# Altium PCB 飞控板.PcbDoc
Units mil, origin at the board's own origin, x right, y up, seen from the top; angles counter-clockwise.
Board outline 2575 x 2635 mil, 2 copper layers (Top Layer, Bottom Layer); 58 components, 95 nets, 351 pads, 114 vias.
Unrouted connection lines stored in the file: 8.
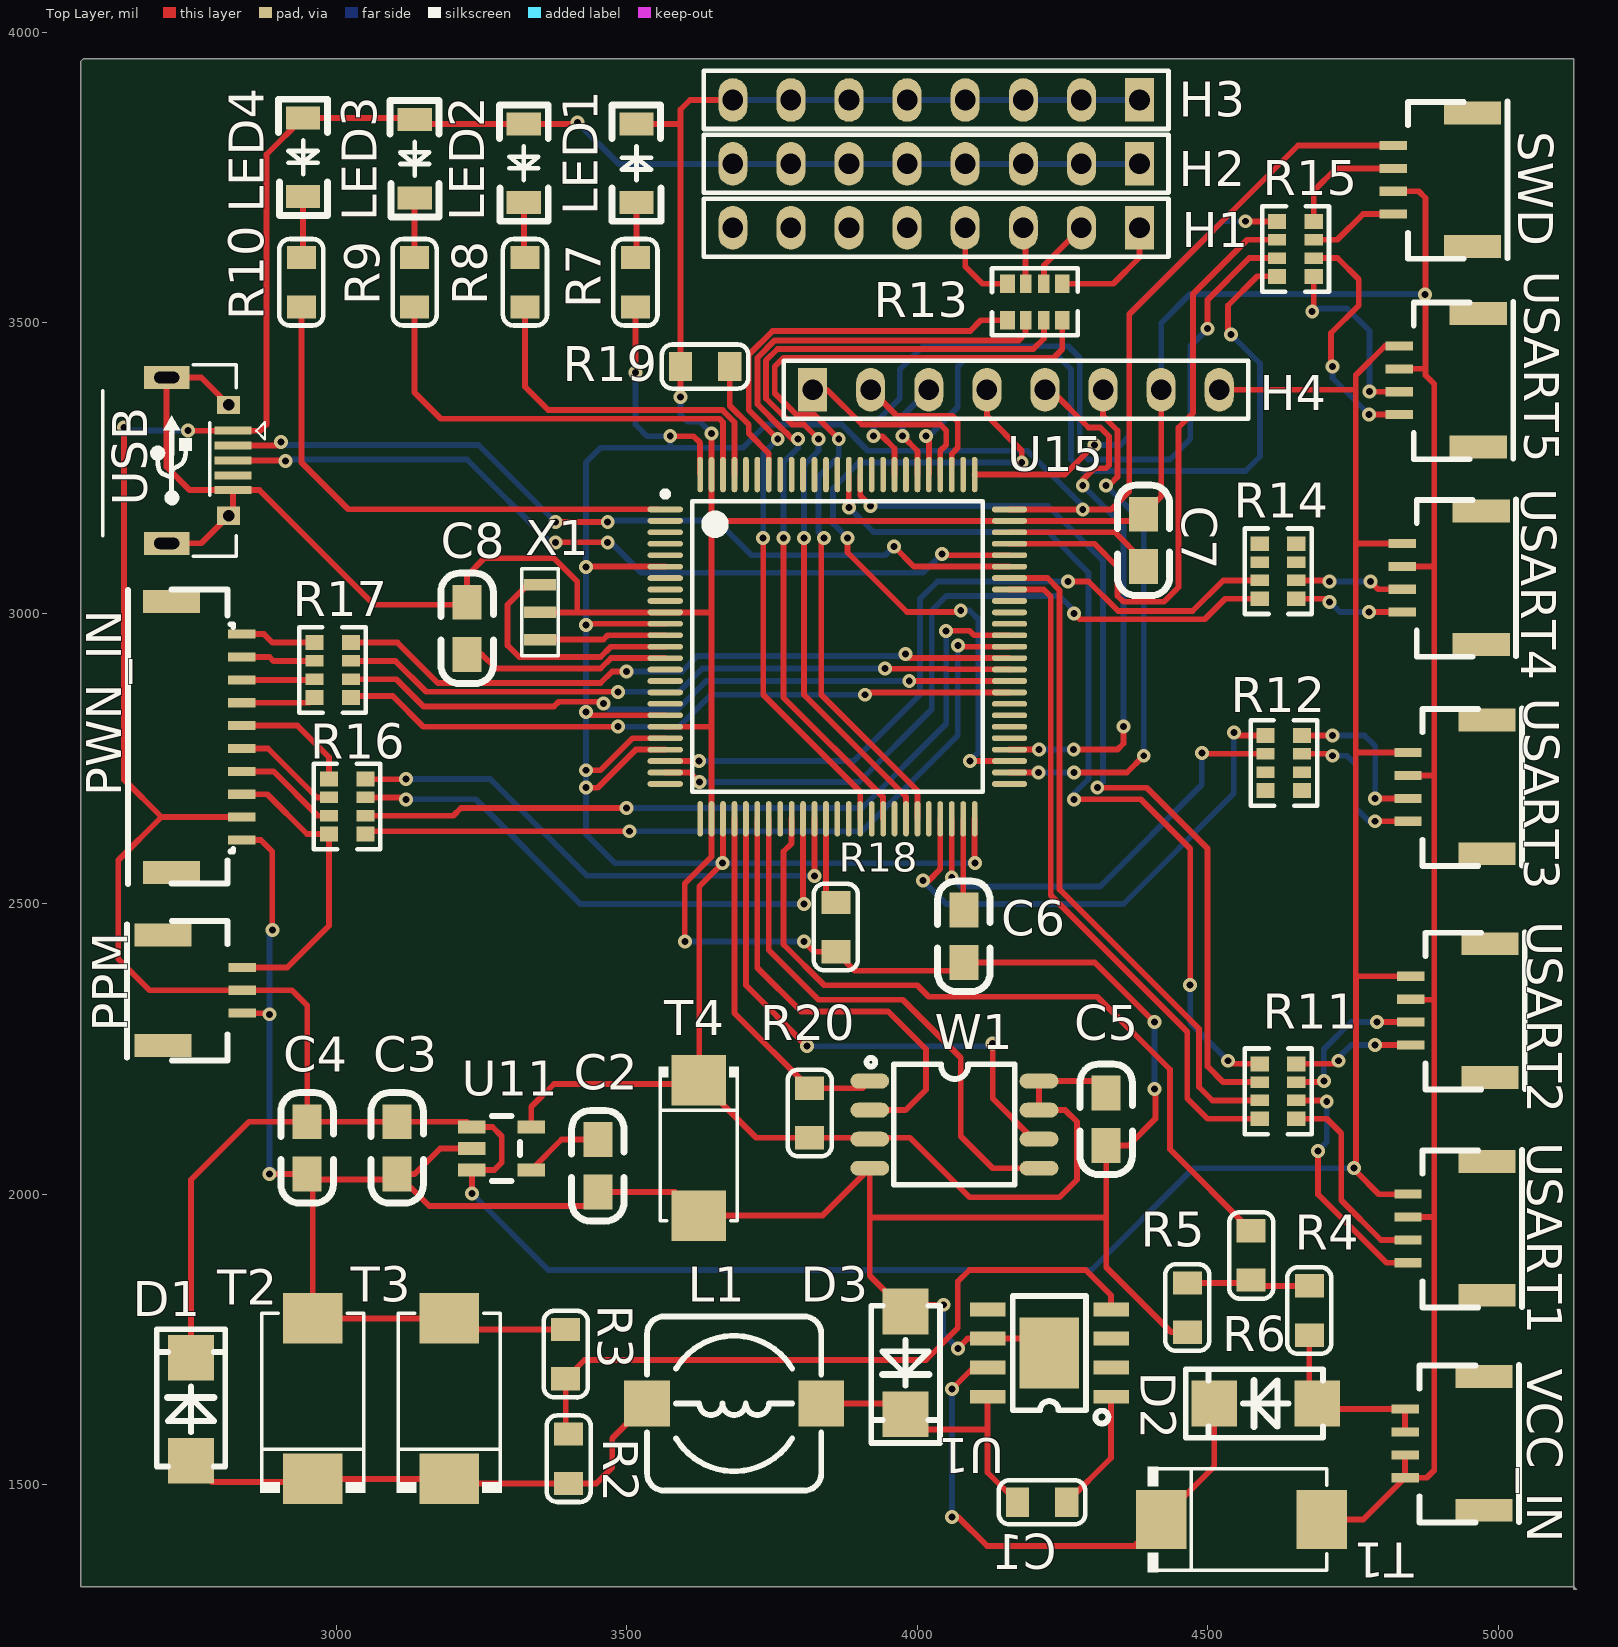
[diagram p0: Top Layer view]
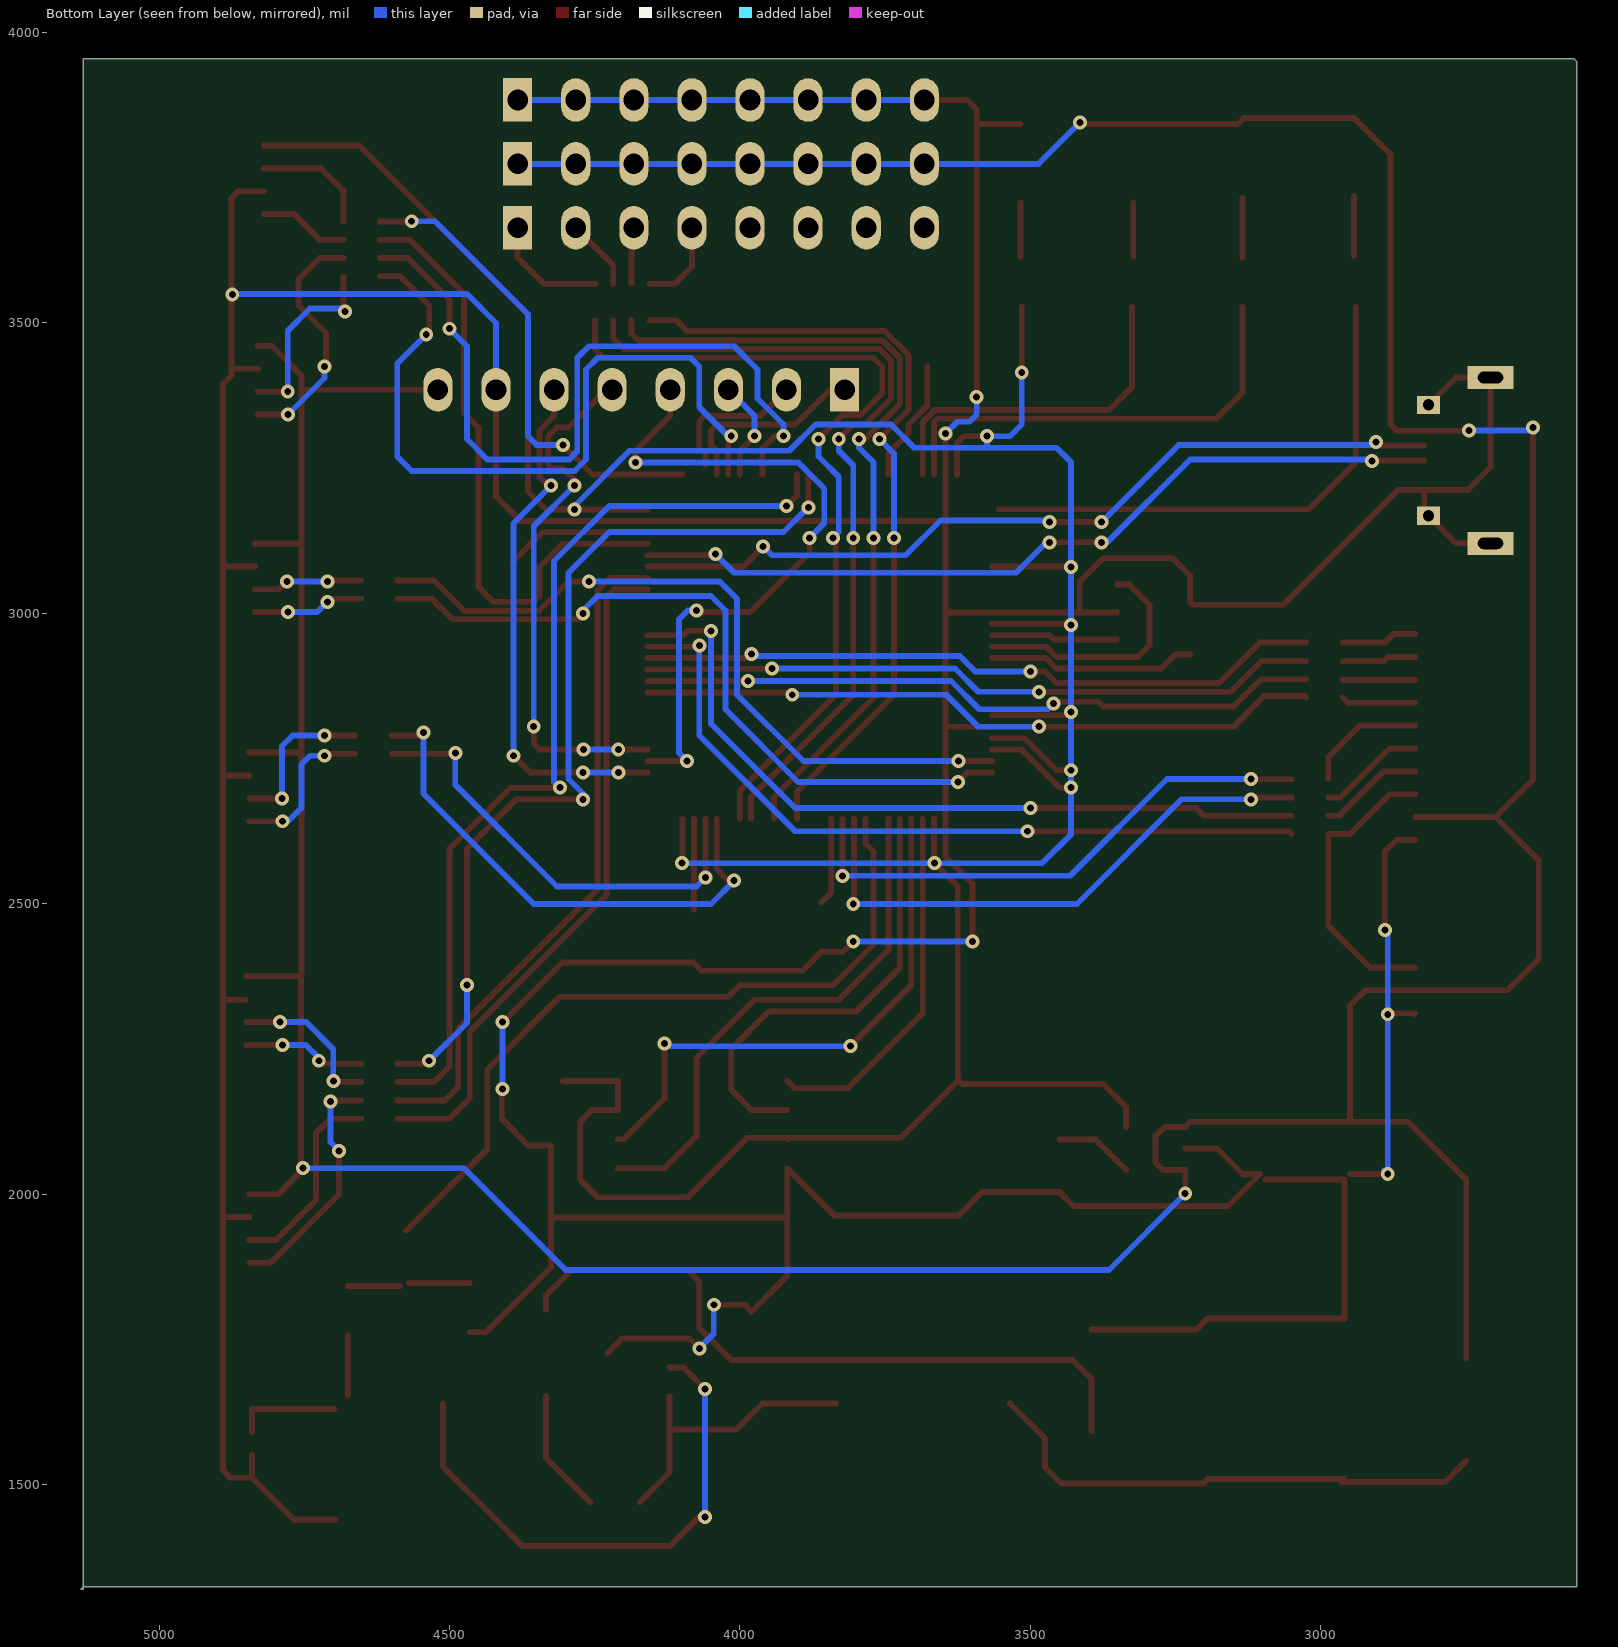
[diagram p1: Bottom Layer view, seen from below]
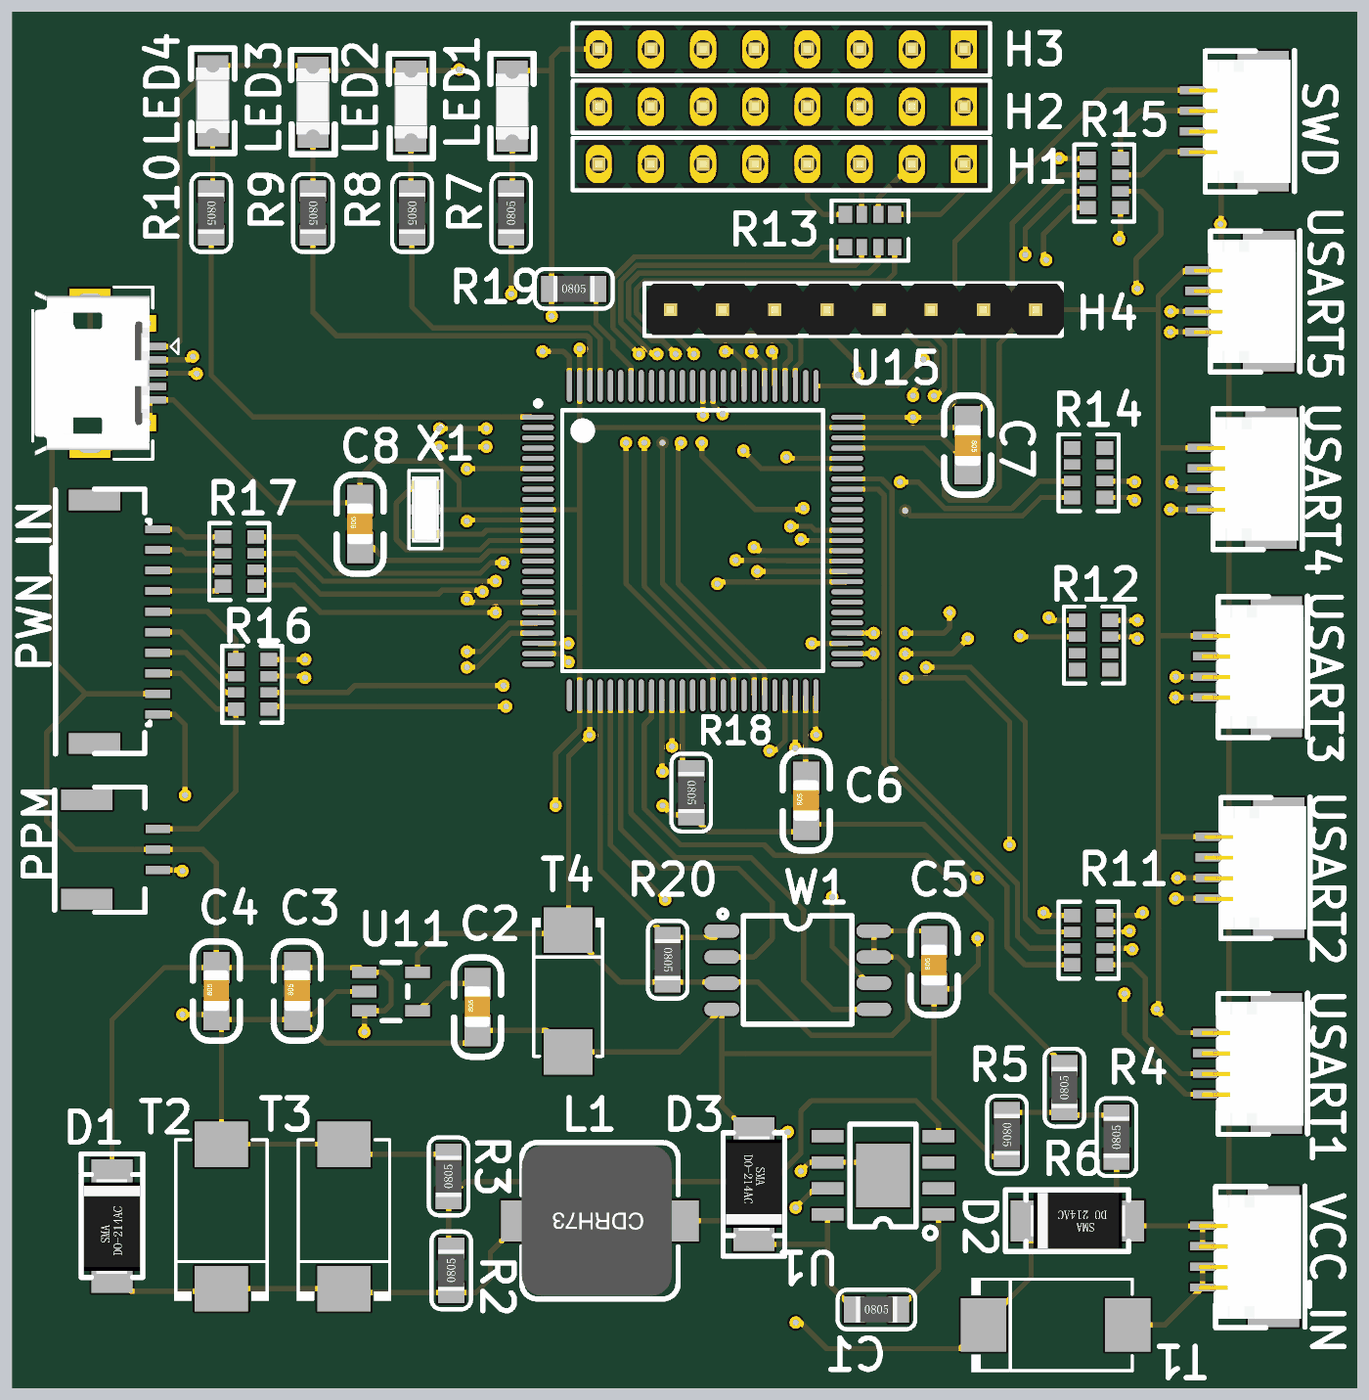
[diagram p2: 3D render of the assembled board from above, using the file's embedded part models]

## Layer stack, top to bottom
Top Layer: signal copper 1.4
Dielectric: dielectric 12.6, FR-4, Dk 4.8
Bottom Layer: signal copper 1.4

## Board outline
5135,1320 5130,1325 2560,1325 2560,3950 2565,3955 5130,3955 5130,1320

## Design rules (kind name [scope] priority, off if disabled: settings)
Clearance Clearance_3 [All] p1: gap=1
Clearance Clearance_2 [All] p2: gap=1
Clearance Clearance_1 [All] p3: gap=1
Clearance [All] p4: gap=1
PolygonConnect [All] p1: connectstyle=Relief reliefconductorwidth=10 reliefentries=4 polygonreliefangle="90 Angle"
RoutingVias [All] p1: holewidth=28 width=50 viastyle="Through Hole" minholewidth=28 minwidth=50 maxholewidth=28 maxwidth=50
SilkscreenOverComponentPads [All] p1: minsilkscreentomaskgap=10
SolderMaskExpansion [All] p1: expansion=4
Width [All] p1: maxlimit=10 minlimit=10 preferedwidth=10
27 further rules are at their usual default settings.

## Components (designator, comment, footprint, x,y, rotation, side; value= is the part's Value field where it differs from the comment)
C1 "10nF50V" 0805L 4215,1470 r0 top
C2 "0.1uf50v" 0805C 3450,2005 r90 top
C3 "0.1uf50v" 0805C 3104.6,2035.71 r90 top
C4 "4.7uf16v" 0805C 2949.6,2035.71 r90 top
C5 "1uf10v" 0805C 4325,2085 r90 top
C6 "0.1uf50v" 0805C 4080,2400 r90 top
C7 "0.1uf50v" 0805C 4390,3170 r270 top
C8 "0.1uf50v" 0805C 3225,2930 r90 top
D1 "1N5819" DO214AC_SMA 2750,1630 r90 top
D2 "1N5819" DO214AC_SMA 4600,1640 r180 top
D3 "1N5819" DO214AC_SMA 3980,1710 r270 top
H1 "Header 8" HDR1X8 4032.68,3663.78 r180 top
H2 "Header 8" HDR1X8 4032.68,3773.78 r180 top
H3 "Header 8" HDR1X8 4032.68,3883.78 r180 top
H4 "Header 8" HDR1X8 4170,3385 r0 top
L1 "CD54-22UH2A" CDRH73 3685,1640 r180 top
LED1 "" LED-1206 3515,3785 r180 top
LED2 "" LED-1206 3325,3765 r0 top
LED3 "" LED-1206 3137,3772.5 r0 top
LED4 "" LED-1206 2945,3775 r0 top
PPM "PPM" SH1.0-3P 2770,2370 r90 bottom (schematic designator U9)
PWN_IN "SH1.0-10P" SH1.0-10P 2755,2765 r90 top (schematic designator P1)
R2 "50K" 0805R 3400,1545 r90 top
R3 "15K" 0805R 3395,1725 r90 top
R4 "10K" 0805R 4675,1800 r90 top
R5 "1K" 0805R 4465,1805 r270 top
R6 "1K" 0805R 4575,1895 r90 top
R7 "1K" 0805R 3515,3570 r90 top
R8 "1K" 0805R 3325,3570 r270 top
R9 "1K" 0805R 3135,3570 r270 top
R10 "1K" 0805R 2940,3570 r270 top
R11 "1k0603" 1k0603#1 4620,2185 r270 top
R12 "1k0603" 1k0603#2 4630,2735 r90 top
R13 "1k0603" 1k0603#2 4210,3535 r180 top
R14 "1k0603" 1k0603#2 4620,3065 r90 top
R15 "1k0603" 1k0603#1 4650,3635 r270 top
R16 "1k0603" 1k0603#2 3020,2675 r270 top
R17 "1k0603" 1k0603#2 2995,2910 r270 top
R18 "10K" 0805R 3860,2460 r270 top
R19 "10K" 0805R 3635,3425 r0 top
R20 "4.3K" 0805R 3815,2140 r270 top
SWD "SWD" SH1.0-4P 4930,3750 r270 top (schematic designator U10)
T1 "TC100UF" TC100UF 4570,1435 r180 top
T2 "47UF16V" 47UF16V 2950,1655 r270 top
T3 "47UF16V" 47UF16V 3185,1655 r270 top
T4 "TC10UF" TC10UF 3630,2050 r270 top
U1 "TPS5430" TPS5430 4235,1760 r90 top
U11 "MIC5219" MIC5219 3280,2065 r270 top
U15 "STM32F407VGT6!" STM32F407VGT6! 3915,2975 r0 top
USART1 "USART1" SH1.0-4P 4955,1945 r270 top (schematic designator U3)
USART2 "USART2" SH1.0-4P 4960,2320 r270 top (schematic designator U4)
USART3 "USART3" SH1.0-4P 4955,2705 r270 top (schematic designator U5)
USART4 "USART4" SH1.0-4P 4945,3065 r270 top (schematic designator U6)
USART5 "USART5" SH1.0-4P 4940,3405 r270 top (schematic designator U7)
USB "ANO-USB" ANO-USB 2720,3260 r270 bottom (schematic designator U2)
VCC_IN "" SH1.0-4P 4950,1575 r270 top (schematic designator U8)
W1 "W25Q32" W25Q32 4075,2115 r270 top
X1 "陶瓷晶振" 陶瓷晶振 3360,2995 r270 top

## Footprints (in the part's own frame and the unit in brackets; to place one, negate y for a bottom-side part, rotate by r counter-clockwise, add the part's x,y. Pads: shape width x height; smd on the part's side, far side on the other; paste and mask are expansions set on the pad)
1k0603#1 [mm]
  rect 0.65x0.8 smd: 1(-1.008,-0.774) 4(1.392,-0.774) 5(1.392,0.826) 8(-1.008,0.826)
  rect 0.5x0.8 smd: 2(-0.208,-0.774) 3(0.592,-0.774) 6(0.592,0.826) 7(-0.208,0.826)
  silkscreen extent -1.68,-1.42 2.06,1.5
1k0603#2 [mm]
  rect 0.65x0.8 smd: 1(-1.008,0.774) 4(1.392,0.774) 5(1.392,-0.826) 8(-1.008,-0.826)
  rect 0.5x0.8 smd: 2(-0.208,0.774) 3(0.592,0.774) 6(0.592,-0.826) 7(-0.208,-0.826)
  silkscreen extent -1.68,-1.5 2.06,1.42
47UF16V [mm]
  rect 2.208x2.592 smd: 1(3.681,0.245) 2(-3.341,0.245)
  silkscreen extent -3.56,-2.06 4.28,2.55
0805C [mil]
  rect 60x50 smd: 1(-0.71,-0.4) 2(89.29,-0.4)
  silkscreen extent -51,-45 139,45, body extent 6,-25 84,25, height 31
0805L [mil]
  rect 40x50 smd: 1(-42.5,0) 2(42.5,0)
  silkscreen extent -75,-38 75,38, body extent -39,-25 39,25, height 22
0805R [mil]
  rect 40x50 smd: 1(-42.5,0) 2(42.5,0)
  silkscreen extent -75,-38 75,38, body extent -39,-25 39,25, height 22
ANO-USB [mm]
  rect 0.35x1.6 smd far side: 1(-1.385,-2.599) 2(-0.735,-2.599) 3(-0.085,-2.599) 4(0.565,-2.599) 5(1.215,-2.599)
  rect 1x2 hole 0.5 slot 1.1 at 90 deg: 5(-3.71,0.301) 5(3.54,0.301)
  rect 0.8x1 hole 0.5: 5(-2.51,-2.409) 5(2.34,-2.409)
  body extent -4.09,-2.59 3.92,3.01, height 2.8
CDRH73 [mm]
  rect 2x2 smd: 1(-3.81,0) 2(3.81,0)
  silkscreen extent -3.81,-3.81 3.81,3.81, body extent -3.49,-3.65 3.81,3.65, height 3.65
DO214AC_SMA [mm]
  rect 2x2 smd: 1(-2.25,0) 2(2.25,0)
  silkscreen extent -2.5,-1.5 3.5,1.5, body extent -2.33,-1.35 2.27,1.35, height 2.4
HDR1X8 [mm]
  rect 1.27x1.905 hole 0.9: 1(-8.89,0)
  oval 1.27x1.905 hole 0.9: 2(-6.35,0) 3(-3.81,0) 4(-1.27,0) 5(1.27,0) 6(3.81,0) 7(6.35,0) 8(8.89,0)
  silkscreen extent -10.16,-1.27 10.16,1.27, body extent -10.26,-1.25 10.06,1.25, height 3
LED-1206 [mil]
  rect 59.05x39.37 smd: 1(-2,77.5) 2(-2,-57.5)
  silkscreen extent -44,-90 40,110, body extent -33,-52 30,74, height 43
MIC5219 [mil]
  rect 21.7x47.2 smd: 1(-51,-46.4) 2(-14,-46.4) 3(23,-46.4) 4(23,55.6) 5(-51,55.6)
  silkscreen extent -70,-12 42,37
SH1.0-3P [mm]
  rect 1x2.5 smd far side: 0(-2.897,-1.728) 0(1.945,-1.728)
  rect 0.4x1.2 smd far side: 1(0.525,1.729) 2(-0.475,1.729) 3(-1.475,1.729)
SH1.0-4P [mm]
  rect 0.4x1.2 smd: 1(-1.406,-2.799) 2(-0.406,-2.799) 3(0.594,-2.799) 4(1.594,-2.799)
  rect 1x2.5 smd: 5(-2.827,0.658) 5(3.015,0.658)
  silkscreen extent -3.33,-2.16 3.55,2.18, body extent -2.89,-2.97 3.11,1.99, height 3.14
SH1.0-10P [mm]
  rect 1x2.5 smd: 0(-5.358,0.982) 0(6.484,0.982)
  rect 0.4x1.2 smd: 1(-3.937,-2.099) 2(-2.937,-2.099) 3(-1.937,-2.099) 4(-0.937,-2.099) 5(0.063,-2.099) 6(1.063,-2.099) 7(2.063,-2.099) 8(3.063,-2.099) 9(4.063,-2.099) 10(5.063,-2.099)
  silkscreen extent -5.87,-1.72 7.02,2.88
STM32F407VGT6! [mm]
  oval 1.55x0.25 smd: 1(-8.854,5.179) 2(-8.854,4.679) 3(-8.854,4.179) 4(-8.854,3.679) 5(-8.854,3.179) 6(-8.854,2.679) 7(-8.854,2.179) 8(-8.854,1.679) 9(-8.854,1.179) 10(-8.854,0.679) 11(-8.854,0.179) 12(-8.854,-0.321) 13(-8.854,-0.821) 14(-8.854,-1.321) 15(-8.854,-1.821) 16(-8.854,-2.321) 17(-8.854,-2.821) 18(-8.854,-3.321) 19(-8.854,-3.821) 20(-8.854,-4.321) 21(-8.854,-4.821) 22(-8.854,-5.321) 23(-8.854,-5.821) 24(-8.854,-6.321) 25(-8.854,-6.821) 51(6.196,-6.821) 52(6.196,-6.321) 53(6.196,-5.821) 54(6.196,-5.321) 55(6.196,-4.821) 56(6.196,-4.321) 57(6.196,-3.821) 58(6.196,-3.321) 59(6.196,-2.821) 60(6.196,-2.321) 61(6.196,-1.821) 62(6.196,-1.321) 63(6.196,-0.821) 64(6.196,-0.321) 65(6.196,0.179) 66(6.196,0.679) 67(6.196,1.179) 68(6.196,1.679) 69(6.196,2.179) 70(6.196,2.679) 71(6.196,3.179) 72(6.196,3.679) 73(6.196,4.179) 74(6.196,4.679) 75(6.196,5.179)
  oval 0.25x1.55 smd: 26(-7.329,-8.346) 27(-6.829,-8.346) 28(-6.329,-8.346) 29(-5.829,-8.346) 30(-5.329,-8.346) 31(-4.829,-8.346) 32(-4.329,-8.346) 33(-3.829,-8.346) 34(-3.329,-8.346) 35(-2.829,-8.346) 36(-2.329,-8.346) 37(-1.829,-8.346) 38(-1.329,-8.346) 39(-0.829,-8.346) 40(-0.329,-8.346) 41(0.171,-8.346) 42(0.671,-8.346) 43(1.171,-8.346) 44(1.671,-8.346) 45(2.171,-8.346) 46(2.671,-8.346) 47(3.171,-8.346) 48(3.671,-8.346) 49(4.171,-8.346) 50(4.671,-8.346) 76(4.671,6.704) 77(4.171,6.704) 78(3.671,6.704) 79(3.171,6.704) 80(2.671,6.704) 81(2.171,6.704) 82(1.671,6.704) 83(1.171,6.704) 84(0.671,6.704) 85(0.171,6.704) 86(-0.329,6.704) 87(-0.829,6.704) 88(-1.329,6.704) 89(-1.829,6.704) 90(-2.329,6.704) 91(-2.829,6.704) 92(-3.329,6.704) 93(-3.829,6.704) 94(-4.329,6.704) 95(-4.829,6.704) 96(-5.329,6.704) 97(-5.829,6.704) 98(-6.329,6.704) 99(-6.829,6.704) 100(-7.329,6.704)
  silkscreen extent -8.98,-7.17 5.02,5.98
TC10UF [mil]
  rect 86.91x93.54 smd: 1(-146.55,-6.01) 2(86.62,-6.01)
  silkscreen extent -170,-75 95,63
TC100UF [mil]
  rect 86.91x102.05 smd: 1(149.93,-5.35) 2(-126.55,-5.35)
  silkscreen extent -135,-96 173,85
TPS5430 [mm]
  rect 0.6x1.55 smd: 1(-2.747,-2.508) 2(-1.477,-2.508) 3(-0.207,-2.508) 4(1.063,-2.508) 5(1.063,2.892) 6(-0.207,2.892) 7(-1.477,2.892) 8(-2.747,2.892)
  rect 3.1x2.6 smd: 9(-0.842,0.192)
  silkscreen extent -3.93,-2.39 1.66,1.79
W25Q32 [mil]
  oval 25.59x66.86 smd: 1(-80,-156.54) 2(-30,-156.54) 3(20,-156.54) 4(70,-156.54) 5(70,134.81) 6(20,134.81) 7(-30,134.81) 8(-80,134.81)
  silkscreen extent -120,-162 99,93
陶瓷晶振 [mm]
  rect 0.5x1.4 smd: 1(-1.384,-0.24) 2(-0.184,-0.24) 3(1.016,-0.24)
  silkscreen extent -2.08,-1.04 1.72,0.56, body extent -1.78,-0.89 1.42,0.41, height 0.7

## Part data
C2 C3 C4 C5 C6 C7 C8: library part CAP
D1 D2 D3: library part 1N5817-5819SMD
L1: library part INDUCTOR
PPM SWD USART1 USART2 USART3 USART4 USART5 VCC_IN: library part SH1.
PWN_IN: library part SH1.0
R11 R12 R13 R14 R15 R16 R17: library part 1k
T1: library part TC1
T4: library part TC
U1: library part TPS
U11: library part MIC
U15: library part STM32F407V
USB: library part ANO
W1: library part W2

## Free pads (board coordinates)
  round 5 hole 5: 0(3485,2865) 0(3624.17,2745.83) 0(4260,3055) 0(4777.77,3002.23)
  round 13 hole 8: 0(4050,2970) 0(4070,2945)

## Via types
v1: diameter 24, hole 12, Top Layer to Bottom Layer, 112 vias
v2: diameter 24, hole 12, Top Layer to Bottom Layer, tented top, 2 vias

## Nets (pads, with @x,y where several pads share a name; then routed paths per layer and width w, separated by ;. In a path a pad name is that pad's centre, name@x,y a point inside that pad or via, vN(x,y) a via of type N, cw(c..) or ccw(c..) an arc to the next point about the centre after c; other vN are vias at no path point)
BOOT1: R18.1 U15.37 | length 151
  Top Layer w10: U15.37 3843,2519.5 R18.1
GND: C2.1 C3.1 C4.1 C5.1 C6.1 C7.1 C8.2 D3.1 H3.1 H3.2 H3.3 H3.4 H3.5 H3.6 H3.7 H3.8 H4.7 LED1.2 PPM.3 PWN_IN.1 R3.2 R5.2 R18.2 R19.1 SWD.3 T1.2 T2.2 T3.2 T4.2 U1.6 U1.9 U11.2 U15.10 U15.20 U15.27 U15.74 U15.99 USART1.2 USART2.2 USART3.2 USART4.2 USART5.2 USB.5 VCC_IN.3 VCC_IN.4 W1.4 X1.2 | length 13583
  Top Layer w10: USB.5@2708.15,3120.63 2767.6,3120.63 2814.84,3167.87 2822.32,3175.35 USB.5@2822.32,3212.17 ; USB.5@2814.84,3358.82 2767.6,3406.06 2708.15,3406.06 2708.15,3251.85 2747.83,3212.17 USB.5@2822.32,3212.17 ; PWN_IN.1 2870,2610 2890,2590 v1(2890,2455) ; PPM.3@2839.99,2310 PPM.3 2883.09,2311.91 v1(2885,2310) ; v1(2885,2035) C4.1 ; C3.1@3095.35,2025.35 2959.65,2025.35 T2.2 T3.2 3213.69,1767.5 R3.2 ; U11.2 3179,2079 3135,2035 C3.1 3160,1980 3426.11,1980 C2.1 3583.07,2004.29 T4.2 3836.84,1963.38 W1.4 3918.46,1960 ; X1.2 3351.06,3001.74 X1.2@3360.47,3001.74 ; X1.2@3359.45,3002.76 X1.2@3360.47,3001.74 ; LED1.2 3590,3842.5 ; U15.20 3646.01,2804.88 ; v1(3592.5,3372.5) R19.1 3592.5,3867.5 3608.78,3883.78 H3.8 ; v1(3600,2435) 3600,2535 3646.14,2581.14 U15.27 3646.14,3001.74 ; v1(3646.14,3310) U15.99 3646.14,3001.74 ; 3646.92,3159.22 U15.74 4378.11,3159.22 C7.1 4420,3201.11 H4.7 ; v1(3805,2435) 3822.5,2417.5 R18.2 3892.5,2385 4066.11,2385 C6.1 4305.71,2399.29 v1(4408.6,2296.4) ; v1(4045,1810) 3991.42,1810 D3.1 3918.46,1860.12 3918.46,1960 ; v1(4070,1735) 4086.85,1751.85 U1.6 4202.45,1751.85 U1.9 ; 4320.4,1960 3918.46,1960 ; v1@4410,2180 4410,2130 4364.29,2084.29 C5.1 4325.4,1874.6 4437.5,1762.5 R5.2 ; T1.2 4767.94,1440.35 VCC_IN.4 ; SWD.3 4863.4,3726.6 4875,3715 4875,3410 4890,3395 4890,2335 ; USART5.2 4874.03,3420.97 ; USART4.2 4885.97,3080.97 ; VCC_IN.3 VCC_IN.4 ; USART1.2 4889.03,1960.97 ; USART3.2 4889.03,2720.97 ; USART2.2@4850.79,2335 4890,2335 ; USB.5@2822.32,3212.17 2867.83,3212.17 3065,3015 3221.11,3015 C8.2 3225.4,3065.4 3255,3095 3375,3095 3415,3055 3415,3001.74 ; X1.2@3360.47,3001.74 3415,3001.74 ; 3415,3001.74 U15.10 3646.14,3001.74 ; VCC_IN.4 4877.23,1512.23 4890,1525 4890,2335
  Bottom Layer w10: v1(2890,2455) 2885,2450 v1(2885,2310) v1(2885,2035) v1@2891.28,2041.28 ; v1(3592.5,3372.5) 3592.5,3342.5 3605,3330 3626.14,3330 v1(3646.14,3310) ; v1(3600,2435) v1(3805,2435) ; H3.8 H3.7 H3.6 H3.5 H3.4 H3.3 H3.2 H3.1 ; v1(4045,1810) 4045,1760 v1(4070,1735) ; v1(4408.6,2181.4) v1(4408.6,2296.4) ; H4.7 4420,3500 4470,3550 4872.8,3550 v1(4873.9,3548.9)
LED_1: R8.2 U15.97 | length 613.6
  Top Layer w10: R8.2 3325,3390 3365,3350 3665,3350 3666.5,3348.5 3666.5,3347.94 3685.51,3328.94 U15.97
LED_2: R9.2 U15.98 | length 789.6
  Top Layer w10: R9.2 3135,3380 3180,3335 3660,3335 3665.83,3329.17 U15.98
LED_3: R10.2 U15.1 | length 915.1
  Top Layer w10: R10.2 2940,3260 3020.86,3179.14 U15.1@3554.14,3179.14
NetC1_1: C1.1 D3.2 L1.1 U1.8 | length 507.9
  Top Layer w10: L1.1 3961.42,1640 D3.2 4006.42,1595 4121.15,1595 ; U1.8 4121.15,1595 ; C1.1 4121.15,1521.35 4121.15,1595
NetC1_2: C1.2 U1.1 | length 213.4
  Top Layer w10: C1.2 4333.75,1546.25 U1.1
NetC2_2: C2.2 U11.4 | length 136.5
  Top Layer w10: U11.4 3387.89,2094.29 C2.2
NetC6_2: C6.2 U15.49 | length 155.9
  Top Layer w10: C6.2@4079.22,2490.48 U15.49
NetC7_2: C7.2 U15.73 | length 260.7
  Top Layer w10: U15.73 4340.47,3139.53 4389.6,3090.4 C7.2
NetC8_1: C8.1 U15.14 | length 358.5
  Top Layer w10: C8.1 3250.71,2929.29 3275,2905 3455,2905 3472.99,2922.99 U15.14
NetD1_1: D1.1 L1.2 R2.1 T2.1 T3.1 | length 901.7
  Top Layer w10: D1.1 2786.42,1505 2964.93,1505 2959.86,1510.07 T3.1 3202.21,1502.5 R2.1 3447.5,1502.5 3475,1530 3475,1580 L1.2
NetLED1_1: LED1.1 R7.2 | length 93
  Top Layer w10: R7.2@3517,3614.5 LED1.1
NetLED2_2: LED2.2 R8.1 | length 93
  Top Layer w10: R8.1@3323,3614.5 LED2.2
NetLED3_2: LED3.2 R9.1 | length 102.5
  Top Layer w10: R9.1 LED3.2
NetLED4_2: LED4.2 R10.1 | length 102
  Top Layer w10: R10.1@2943,3615.5 LED4.2
NetR2_2: R2.2 R3.1 U1.4 | length 1195.8
  Top Layer w10: R2.2@3395,1592.5 R3.1 3427.5,1715 4015,1715 4070,1770 4070,1850 4090,1870 4290,1870 4333.75,1826.25 U1.4
NetR4_2: R4.2 R5.1 R6.1 | length 195
  Top Layer w10: R5.1 R6.1@4570,1847.5 ; R6.1@4585,1842.5 R4.2
NetR19_2: R19.2 U15.94 | length 213.8
  Top Layer w10: R19.2 3677.5,3357.5 3710,3325 3710,3310 3744.57,3275.43 U15.94
NetU15_12: U15.12 X1.3 | length 218.9
  Top Layer w10: X1.3 3460,2955 3467.37,2962.37 U15.12
NetU15_13: U15.13 X1.1 | length 426.9
  Top Layer w10: X1.1 3329.49,3049.49 3295,3015 3295,2945 3315,2925 3455,2925 3472.68,2942.68 U15.13
OTG_FS_DM: U15.70 USB.2 | length 1431.8
  Top Layer w10: USB.2 2898.94,3288.94 v1(2905,3295) ; v1(3377.37,3157.37) v1(3467.37,3157.37) ; v1(3960,3115) 3994.52,3080.48 U15.70
  Bottom Layer w10: v1@2910,3290 3244.74,3290 v1(3377.37,3157.37) ; v1@3470,3160 3655,3160 3715,3100 3945,3100 v1(3960,3115)
OTG_FS_DP: U15.71 USB.3 | length 1424.2
  Top Layer w10: USB.3 2911.39,3263.35 v1(2912.37,3262.37) ; v1(3377.37,3122.37) v1(3467.37,3122.37) ; v1@4045.16,3100.16 U15.71
  Bottom Layer w10: v1@2915,3265 3225,3265 3367.63,3122.37 v1(3377.37,3122.37) ; v1@3470,3125 3525,3070 4010,3070 v1(4042.37,3102.37)
POWER_INPUT: R6.2 U15.34 | length 1311.7
  Top Layer w10: U15.34 3783.94,2603.94 3770,2590 3770,2430 3840,2360 4000,2360 4020,2340 4310,2340 4435,2215 4435,2077.5 R6.2
PPM_IN: PPM.1 PWN_IN.3 R16.5 | length 515.1
  Top Layer w10: PWN_IN.3 2881.26,2688.74 2949.81,2620.19 R16.5 2987.48,2462.48 2915.65,2390.65 PPM.1
PWMIN_2: PWN_IN.4 R16.6 | length 181.5
  Top Layer w10: PWN_IN.4 2891.89,2728.11 2968.32,2651.68 R16.6
PWMIN_3: PWN_IN.5 R16.7 | length 184.8
  Top Layer w10: PWN_IN.5 2882.52,2767.48 2966.82,2683.18 R16.7
PWMIN_4: PWN_IN.6 R16.8 | length 210.2
  Top Layer w10: PWN_IN.6 2933.15,2806.85 2987.48,2752.52 R16.8
PWMIN_5: PWN_IN.7 R17.5 | length 128.6
  Top Layer w10: PWN_IN.7 2953.52,2846.22 R17.5
PWMIN_6: PWN_IN.8 R17.6 | length 125.3
  Top Layer w10: PWN_IN.8 2961.39,2885.59 R17.6
PWMIN_7: PWN_IN.9 R17.7 | length 127.7
  Top Layer w10: PWN_IN.9 2837.68,2925 2885,2925 2891.82,2918.18 R17.7
PWMIN_8: PWN_IN.10 R17.8 | length 130.9
  Top Layer w10: PWN_IN.10 2875.67,2964.33 2890.33,2949.67 R17.8
PWMOUT_1: H1.1 R13.8 | length 202.8
  Top Layer w10: R13.8 4337.52,3567.52 4382.68,3612.68 H1.1
PWMOUT_2: H1.2 R13.7 | length 123
  Top Layer w10: R13.7 4218.18,3599.28 H1.2
PWMOUT_3: H1.3 R13.6 | length 97.9
  Top Layer w10: H1.3 4186.68,3659.78 R13.6
PWMOUT_4: H1.4 R13.5 | length 151.3
  Top Layer w10: H1.4 4082.68,3597.32 4112.48,3567.52 R13.5
PWMOUT_5: H1.5 R14.6
PWMOUT_6: H1.6 R14.5
PWMOUT_7: H1.7 R12.8
PWMOUT_8: H1.8 R12.7
SPI1_CLK: U15.30 W1.6 | length 953.7
  Top Layer w10: U15.30 3705.2,2359.8 v1(3810,2255) ; v1(4130,2260) 4130,2164.86 4199.86,2095 W1.6
  Bottom Layer w10: v1(3810,2255) v1@4125,2255
SPI1_MISO: U15.31 W1.2 | length 785.5
  Top Layer w10: U15.31 3724.88,2390.12 3800,2315 3950,2315 4015,2250 4015,2180 3980,2145 W1.2
SPI1_MOSI: U15.32 W1.5 | length 925.8
  Top Layer w10: U15.32 3744.57,2420.43 3830,2335 3975,2335 4075,2235 4075,2100 4130,2045 W1.5
SPI1_NSS: R20.1 U15.29 W1.1 | length 624.8
  Top Layer w10: 3685.51,2311.99 U15.29 ; 3686.5,2311 R20.1 3905.96,2182.5 W1.1
SPI2_CLK: H4.6 U15.52 | length 916.5
  Top Layer w10: U15.52 v1(4208.86,2726.14) ; v1(4270,2726.14) 4361.14,2726.14 v1(4390,2755) ; H4.6 4320,3340 4345,3315 4345,3235 v1@4330,3220
  Bottom Layer w10: v1(4208.86,2726.14) v1(4270,2726.14) ; v1(4325,3220) 4390,3155 v1(4390,2755)
SPI2_CS1: H4.3 U15.81 | length 195.3
  Top Layer w10: v1(3975,3305) 4000.48,3279.52 U15.81
  Bottom Layer w10: v1(3975,3305) 3975,3340 H4.3 H4.3@4020,3365
SPI2_CS2: H4.2 U15.78 | length 252
  Top Layer w10: H4.2 3965,3340 4060.53,3340 4070,3330.53 4070,3285 4059.53,3274.53 U15.78@4059.53,3255.47
SPI2_CS3: H4.1 U15.79 | length 359.3
  Top Layer w10: H4.1@3820,3365 H4.1 3845,3385 3905,3325 4040,3325 4050,3315 4050,3290 4039.85,3279.85 U15.79
SPI2_MISO: H4.4 U15.53 | length 1206.7
  Top Layer w10: v1(3880,3130) 3880,3105 3982.5,3002.5 4072.5,3002.5 v1(4075,3005) ; v1(4090.83,2745.83) U15.53 ; H4.4 4120,3340 4180,3280 v1(4180,3260)
  Bottom Layer w10: v1(3880,3130) 3855,3155 3855,3215 3900,3260 v1(4180,3260) ; v1(4075,3005) 4090,3005 4105,2990 4105,2760 v1(4090.83,2745.83)
SPI2_MOSI: H4.5 U15.54 | length 931.9
  Top Layer w10: U15.54 v1(4209.49,2765.51) ; H4.5 4230,3385 4295,3320 4315,3320 4330,3305 4330,3255 4325,3250 4305,3250 4285,3230 v1(4285,3220) ; v1(4269.49,2765.51) 4344.49,2765.51 4355,2776.01 v1(4355,2805)
  Bottom Layer w10: v1(4209.49,2765.51) v1(4269.49,2765.51) ; v1(4285,3220) 4355,3150 v1(4355,2805)
SPI2_NSS: U15.51
SWCLK: R15.1 U15.76 | length 824.4
  Top Layer w10: U15.76 4253.94,3238.94 v1(4305,3290) ; v1(4565,3675) 4565.33,3674.67 R15.1
  Bottom Layer w10: v1(4305,3290) 4350,3290 4365,3305 4365,3515 4525,3675 v1(4565,3675)
SWCLK_I: R15.8 SWD.2 | length 206.1
  Top Layer w10: R15.8 4682.52,3727.52 4720.97,3765.97 SWD.2
SWDIO: R15.2 U15.72 | length 1070.5
  Top Layer w10: U15.72 4305.15,3119.85 4345,3080 4345,3030 4355,3020 4425,3020 4450,3045 4450,3320 4475,3345 4475,3550 4568.18,3643.18 R15.2
SWDIO_I: R15.7 SWD.4 | length 155.5
  Top Layer w10: R15.7 4723.18,3643.18 4767.23,3687.23 SWD.4
TIM1_CH1: R13.4 U15.40 | length 1368.7
  Top Layer w10: v1(3735,3130) 3735,2860 3902.05,2692.95 U15.40 ; v1(3760,3300) 3710,3350 3710,3445 3751.22,3486.22 4091.22,3486.22 4109.53,3504.53 R13.4
  Bottom Layer w10: v1(3735,3130) 3735,3275 v1(3760,3300)
TIM1_CH2: R13.3 U15.42 | length 1411.9
  Top Layer w10: v1(3770,3130) 3770,2855 3941.42,2683.58 U15.42 ; v1(3795,3300) 3785,3300 3778,3307 3778,3307.46 3767.46,3318 3767,3318 3725,3360 3725,3440 3755,3470 4175,3470 4186.68,3481.68 R13.3
  Bottom Layer w10: v1(3770,3130) 3770,3260 3795,3285 v1(3795,3300)
TIM1_CH3: R13.2 U15.44 | length 1446.4
  Top Layer w10: v2(3805,3130) 3805,2860 3980.79,2684.21 U15.44 ; v1(3830,3300) 3805,3325 3785,3325 3740,3370 3740,3435.56 3759.44,3455 4200,3455 4218.18,3473.18 R13.2
  Bottom Layer w10: v2(3805,3130) 3805,3255 3830,3280 v1(3830,3300)
TIM1_CH4: R13.1 U15.45 | length 1488.4
  Top Layer w10: v1(3840,3130) 3835,3125 3835,2860 4000.48,2694.52 U15.45 ; v1(3865,3300) 3823.5,3341.5 3792.51,3341.5 3755,3379.01 3755,3425 3770,3440 4235,3440 4249.67,3454.67 R13.1
  Bottom Layer w10: v1(3840,3130) 3830,3140 3830,3235 3865,3270 v1(3865,3300)
TIM3_CH1: pad.0@4070,2945 R16.4 U15.63 | length 1334.8
  Top Layer w10: R16.4 3055.28,2625 v1(3505,2625) ; v1(4070,2945) 4072.32,2942.68 U15.63
  Bottom Layer w10: v1(3505,2625) 3905,2625 4070,2790 v1(4070,2945)
TIM3_CH2: pad.0@4050,2970 R16.3 U15.64 | length 1337.2
  Top Layer w10: R16.3 3201.68,2651.68 3215,2665 v1(3500,2665) ; v1(4050,2970) 4090,2970 4097.63,2962.37 U15.64
  Bottom Layer w10: v1(3500,2665) 3905,2665 4050,2810 v1(4050,2970)
TIM3_CH3: R16.2 U15.35 | length 977.4
  Top Layer w10: R16.2 3116.82,2683.18 v1(3120,2680) ; U15.35 3803.62,2501.38 v1(3805,2500)
  Bottom Layer w10: v1(3120,2680) 3240,2680 3420,2500 v1(3805,2500)
TIM3_CH4: R16.1 U15.36 | length 939.7
  Top Layer w10: R16.1 v1@3119.67,2714.67 ; v1(3823.31,2548.31) U15.36
  Bottom Layer w10: v1(3120,2715) 3265,2715 3431.69,2548.31 v1(3823.31,2548.31)
TIM4_CH1: R17.4 U15.59 | length 1180.7
  Top Layer w10: R17.4 3027.92,2857.64 3097.36,2857.64 3150,2805 v1(3485,2805) ; v1(3910,2860) 3913.94,2863.94 U15.59
  Bottom Layer w10: v1(3485,2805) 3590,2805 3645,2860 v1(3910,2860)
TIM4_CH2: R17.3 U15.60 | length 1181.6
  Top Layer w10: R17.3 3103.32,2886.68 3150,2840 3375,2840 3383,2848 3457,2848 v1(3460,2845) ; v1(3986.38,2883.62) U15.60
  Bottom Layer w10: v1(3460,2845) 3470,2835 3588.28,2835 3636.78,2883.5 3986.26,2883.5 v1(3986.38,2883.62)
TIM4_CH3: pad.0@3485,2865 R17.2 U15.61 | length 1172.1
  Top Layer w10: R17.2 3101.82,2918.18 3155,2865 v1(3485,2865) ; v1(3945,2905) U15.61
  Bottom Layer w10: v1(3485,2865) 3590,2865 3630,2905 v1(3945,2905)
TIM4_CH4: R17.1 U15.62 | length 1194.9
  Top Layer w10: R17.1 3105.33,2949.67 3175,2880 3455,2880 3475,2900 v1(3500,2900) ; v1(3980,2930) 3987.01,2922.99 U15.62
  Bottom Layer w10: v1(3500,2900) 3595,2900 3621.5,2926.5 3984.47,2926.5 3980.97,2930 v1(3980,2930)
TIM5_CH3: R14.4 U15.25
TIM5_CH4: R14.3 U15.26
TIM8_CH3: R12.2 U15.65
TIM8_CH4: R12.1 U15.66
USART1_RX: R11.3 U15.69 | length 1163.3
  Top Layer w10: U15.69 4224.21,3060.79 4245,3040 4245,2525 4485,2285 4485,2185 4508.32,2161.68 R11.3
USART1_RX_I: R11.6 USART1.4 | length 420.6
  Top Layer w10: R11.6 v1@4703.32,2161.68 ; v1(4690,2075) 4690,2000 4807.77,1882.23 USART1.4
  Bottom Layer w10: v1(4690,2075) 4705,2090 v1(4705,2160)
USART1_TX: R11.4 U15.68 | length 1176.4
  Top Layer w10: U15.68 4217.89,3041.11 4230,3029 4230,2515 4465,2280 4465,2165 4499.81,2130.19 R11.4
USART1_TX_I: R11.5 USART1.3 | length 346.1
  Top Layer w10: R11.5 4704.81,2130.19 4730,2105 4730,1990 4798.4,1921.6 USART1.3
USART2_RX: R11.1 U15.87 | length 1600.6
  Top Layer w10: v1(3882.37,3182.63) U15.87 ; v1(4270,2680) 4385,2680 4470,2595 v1(4470,2360) ; v1(4535,2230) 4540.33,2224.67 R11.1 R11.1@4589.53,2225.47
  Bottom Layer w10: v1(3882.37,3182.63) 3925,3140 4225,3140 4295,3070 4295,2715 4270,2690 v1(4270,2680) ; v1(4470,2360) 4470,2295 v1(4535,2230)
USART2_RX_I: R11.8 USART2.4 | length 213.7
  Top Layer w10: R11.8 4719.67,2224.67 v1(4725,2230) ; v1(4787.77,2257.23) USART2.4
  Bottom Layer w10: v1(4725,2230) 4725,2235 4747.23,2257.23 v1(4787.77,2257.23)
USART2_TX: R11.2 U15.86 | length 1604
  Top Layer w10: U15.86 3902.05,3202.95 v1(3920,3185) ; v1(4310,2700) 4395,2700 4500,2595 4500,2220 4526.82,2193.18 R11.2
  Bottom Layer w10: v1(3920,3185) 4225,3185 4320,3090 4320,2710 v1(4310,2700)
USART2_TX_I: R11.7 USART2.3 | length 272.4
  Top Layer w10: R11.7 4698.18,2193.18 v1(4700,2195) ; v1(4791.6,2296.6) USART2.3
  Bottom Layer w10: v1(4700,2195) 4700,2250 4746.6,2296.6 v1(4791.6,2296.6)
USART3_RX: R12.3 U15.48 | length 773.2
  Top Layer w10: v1(4059.53,2545.47) U15.48 ; v1@4491.68,2758.32 R12.3
  Bottom Layer w10: v1(4059.53,2545.47) 4075,2530 4315,2530 4490,2705 v1(4490,2760)
USART3_RX_I: R12.6 USART3.4 | length 269.6
  Top Layer w10: R12.6 v1@4711.68,2758.32 ; v1(4787.77,2642.23) USART3.4
  Bottom Layer w10: v1(4715,2755) 4740,2755 4755,2740 4755,2665 4777.77,2642.23 v1(4787.77,2642.23)
USART3_TX: R12.4 U15.47 | length 916.6
  Top Layer w10: v1(4010,2540) 4020,2540 4039.85,2559.85 U15.47 ; v1(4545,2795) 4550.19,2789.81 R12.4
  Bottom Layer w10: v1(4010,2540) 4050,2500 4355,2500 4545,2690 v1(4545,2795)
USART3_TX_I: R12.5 USART3.3 | length 279.7
  Top Layer w10: R12.5 v1@4714.81,2789.81 ; v1(4788.4,2681.6) USART3.3
  Bottom Layer w10: v1(4715,2790) 4770,2790 4788.4,2771.6 v1(4788.4,2681.6)
USART4_RX: R14.1 U15.24 | length 1296.1
  Top Layer w10: U15.24 3608.86,2726.14 v1(3625,2710) ; v2(4270,3000) 4280,2990 4495,2990 4530.33,3025.33 R14.1
  Bottom Layer w10: v1(3625,2710) 3900,2710 4025,2835 4025,3005 4050,3030 4245,3030 4270,3005 v2(4270,3000)
USART4_RX_I: pad.0@4777.77,3002.23 R14.8 USART4.4 | length 184.3
  Top Layer w10: R14.8 v1@4704.67,3025.33 ; v1(4777.77,3002.23) USART4.4
  Bottom Layer w10: v1(4710,3020) 4727.77,3002.23 v1(4777.77,3002.23)
USART4_TX: pad.0@3624.17,2745.83 pad.0@4260,3055 R14.2 U15.23 | length 1290.8
  Top Layer w10: U15.23 v1(3624.17,2745.83) ; v1(4260,3055) 4295,3055 4346,3004 4474,3004 4526.82,3056.82 R14.2
  Bottom Layer w10: v1(3624.17,2745.83) 3890.83,2745.83 4005,2860 4005,3025 4035,3055 v1(4260,3055)
USART4_TX_I: R14.7 USART4.3 | length 186
  Top Layer w10: R14.7 v1@4708.18,3056.82 ; v1(4780,3055) 4793.4,3041.6 USART4.3
  Bottom Layer w10: v1(4710,3055) v1(4780,3055)
USART5_RX: R15.3 U15.83 | length 1331.3
  Top Layer w10: v1(3925,3305) 3940,3305 3961.11,3283.89 U15.83 ; v1(4500,3490) 4500,3540 4571.68,3611.68 R15.3
  Bottom Layer w10: v1(3925,3305) 3925,3325 3970,3370 3970,3420 4010,3460 4260,3460 4280,3440 4280,3278.92 4293.92,3265 4435,3265 4470,3300 4470,3460 v1(4500,3490)
USART5_RX_I: R15.6 USART5.4 | length 424.2
  Top Layer w10: R15.6 4723.32,3611.68 4760,3575 4760,3530 4712.5,3482.5 4712.5,3427.5 v1(4715,3425) ; v1(4777.77,3342.23) USART5.4
  Bottom Layer w10: v1(4715,3425) 4715,3405 v1(4777.77,3342.23)
USART5_TX: R15.4 U15.80 | length 1310.1
  Top Layer w10: v1(4015,3305) 4020.16,3299.84 U15.80 ; v1(4540,3480) 4535,3485 4535,3530 4585.19,3580.19 R15.4
  Bottom Layer w10: v1(4015,3305) 4020,3305 4070,3355 4070,3425 4085,3440 4245,3440 4265,3420 4265,3265 4285,3245 4565,3245 4590,3270 4590,3430 v1(4540,3480)
USART5_TX_I: R15.5 USART5.3 | length 334
  Top Layer w10: v1(4680,3520) 4682.52,3522.52 R15.5 ; v1(4778.4,3381.6) USART5.3
  Bottom Layer w10: v1(4680,3520) 4685,3525 4740,3525 4778.4,3486.6 v1(4778.4,3381.6)
VCC_2S~6S: D2.1 R4.1 VCC_IN.1 VCC_IN.2 | length 284.9
  Top Layer w10: D2.1@4675,1653.58 R4.1 ; D2.1@4698.24,1630.34 VCC_IN.1 VCC_IN.2
VCC_3.3V: C5.2 R7.1 R20.2 SWD.1 T4.1 U11.5 U15.6 U15.11 U15.19 U15.21 U15.22 U15.28 U15.50 U15.75 U15.100 W1.3 W1.7 W1.8 | length 6455.2
  Top Layer w10: U11.5 3335.6,2150.6 3375,2190 3617.45,2190 T4.1 ; v1(3430,2700) 3450,2700 3515.51,2765.51 U15.22 ; v1(3430,2730) 3455,2730 3510.2,2785.2 U15.21 ; v1@3430.43,2824.57 U15.19 ; v1@3430.48,3080.48 U15.6 ; v1@3432.05,2982.05 U15.11 ; v1(3515,3415) R7.1 ; v1(3575,3305) 3615,3305 3626.46,3293.54 U15.100 ; v1(3665,2570) 3625,2530 3625,2197.55 T4.1 ; v1@3665.83,2570.83 U15.28 ; W1.3 W1.3@3915.96,2097.5 ; v1@4098.9,2571.1 U15.50 ; U15.75 v1(4285,3178.9) 4333.9,3178.9 4365,3210 4365,3515 4655.34,3805.34 SWD.1 ; C5.2@4304.7,2195 W1.8 W1.7 4255,2145 4275,2125 4275,2025 4245,1995 4090,1995 3987.5,2097.5 W1.3@3915.96,2097.5 ; T4.1 3723.04,2097.5 R20.2 W1.3@3915.96,2097.5
  Bottom Layer w10: v1(3515,3415) 3515,3325 3535,3305 v1(3575,3305) 3575,3287.5 ; v1@4099.06,2570 v1(3665,2570) 3480,2570 3430,2620 v1(3430,2700) v1(3430,2730) v1(3430,2830) v1(3430,2980) v1(3430,3080) 3430,3260 3455,3285 3700,3285 3740,3325 3870,3325 3915,3280 4190,3280 4285,3185 v1(4285,3178.9)
  other v1: 4099.53,2570.47
VCC_5.0V: C3.2 C4.2 D1.2 H2.1 H2.2 H2.3 H2.4 H2.5 H2.6 H2.7 H2.8 H4.8 LED2.1 LED3.1 LED4.1 PPM.2 PWN_IN.2 U11.1 U11.3 USART1.1 USART2.1 USART3.1 USART4.1 USART5.1 USB.1 | length 8698.8
  Top Layer w10: v1(2635,3320) 2635,2713.74 2699.37,2649.37 ; v1(2745,3315) 2745.47,3314.53 USB.1 2869.53,3314.53 2880,3325 2880,3790 2942.5,3852.5 LED4.1 3132.5,3852.5 LED3.1 3142.5,3842.5 LED2.1 v1@3412.5,3842.5 ; D1.2 2750,2025 2850,2125 C4.2 ; PWN_IN.2 2699.37,2649.37 ; v1(3233.6,2001.4) U11.3 3272,2042 3285,2055 3285,2100 3269,2116 U11.1 3224.6,2125 C3.2 C4.2 ; H4.8 4755,3385 ; 4755,2375 4755,3385 ; 4755.34,2760.34 USART3.1 ; 4755.34,3120.34 USART4.1 ; USART5.1 4805.34,3460.34 4755,3410 4755,3385 ; USART1.1 4794.66,2000.34 4755.34,2039.66 4755.34,2375.34 USART2.1 ; 2699.37,2649.37 2625,2575 2625,2405 2678.72,2351.28 PPM.2 2923.72,2351.28 2950,2325 C4.2
  Bottom Layer w10: v1(2635,3320) 2640,3315 v1(2745,3315) ; v1(3233.6,2001.4) 3365,1870 4300,1870 4475,2045 v1(4752.2,2045) v1@4753.6,2046.4 ; v1(3415,3845) 3486.22,3773.78 H2.8 H2.7 H2.6 H2.5 H2.4 H2.3 H2.2 H2.1
VCC_IN: D2.2 T1.1 U1.7 | length 933.5
  Top Layer w10: v1(4060,1445) 4070,1445 4120,1395 4374.71,1395 T1.1 4511.42,1531.7 D2.2 ; v1(4060,1665) 4096.85,1701.85 U1.7
  Bottom Layer w10: v1(4060,1445) v1(4060,1665)
pads on no net: PPM.0 PWN_IN.0 SWD.5 U1.2 U1.3 U1.5 U15.2 U15.3 U15.4 U15.5 U15.7 U15.8 U15.9 U15.15 U15.16 U15.17 U15.18 U15.33 U15.38 U15.39 U15.41 U15.43 U15.46 U15.55 U15.56 U15.57 U15.58 U15.67 U15.77 U15.82 U15.84 U15.85 U15.88 U15.89 U15.90 U15.91 U15.92 U15.93 U15.95 U15.96 USART1.5 USART2.5 USART3.5 USART4.5 USART5.5 USB.4 VCC_IN.5

## Silkscreen, mask and mechanical layers (free items; w line width, h text height)
Mechanical 1:
  the board outline again, w20.24